# Allegro board WaterDetector_ver1.0.1.brd
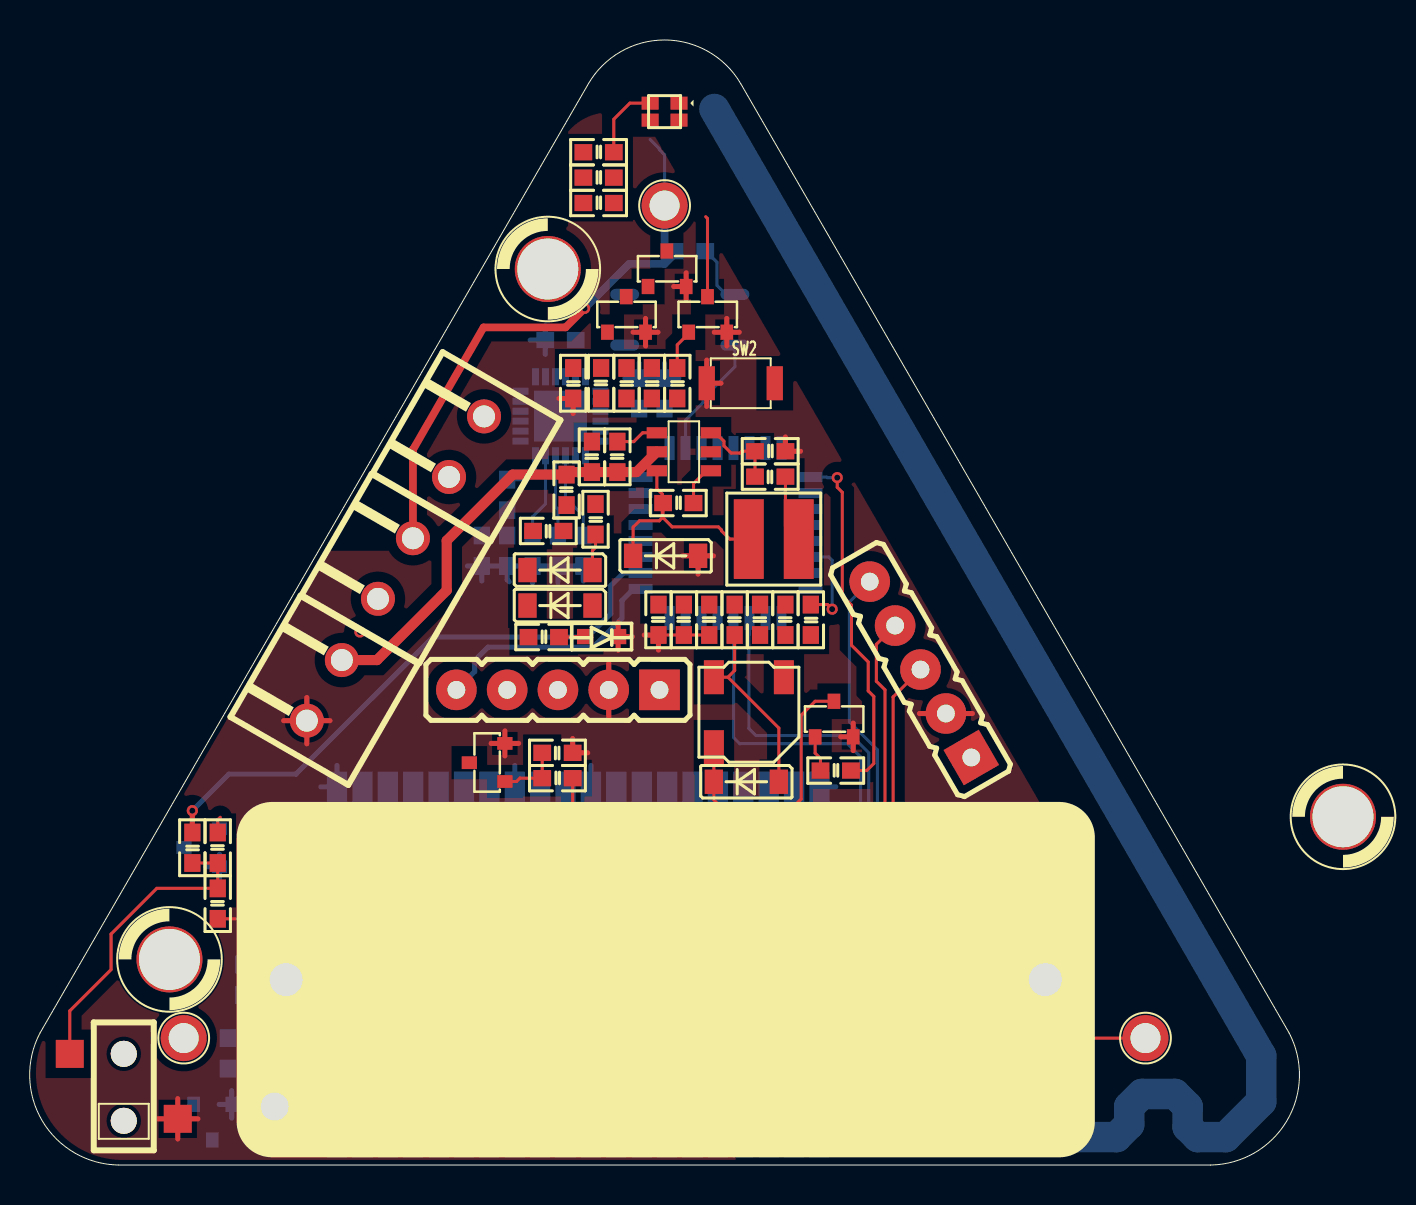
[diagram p0: board, top side]
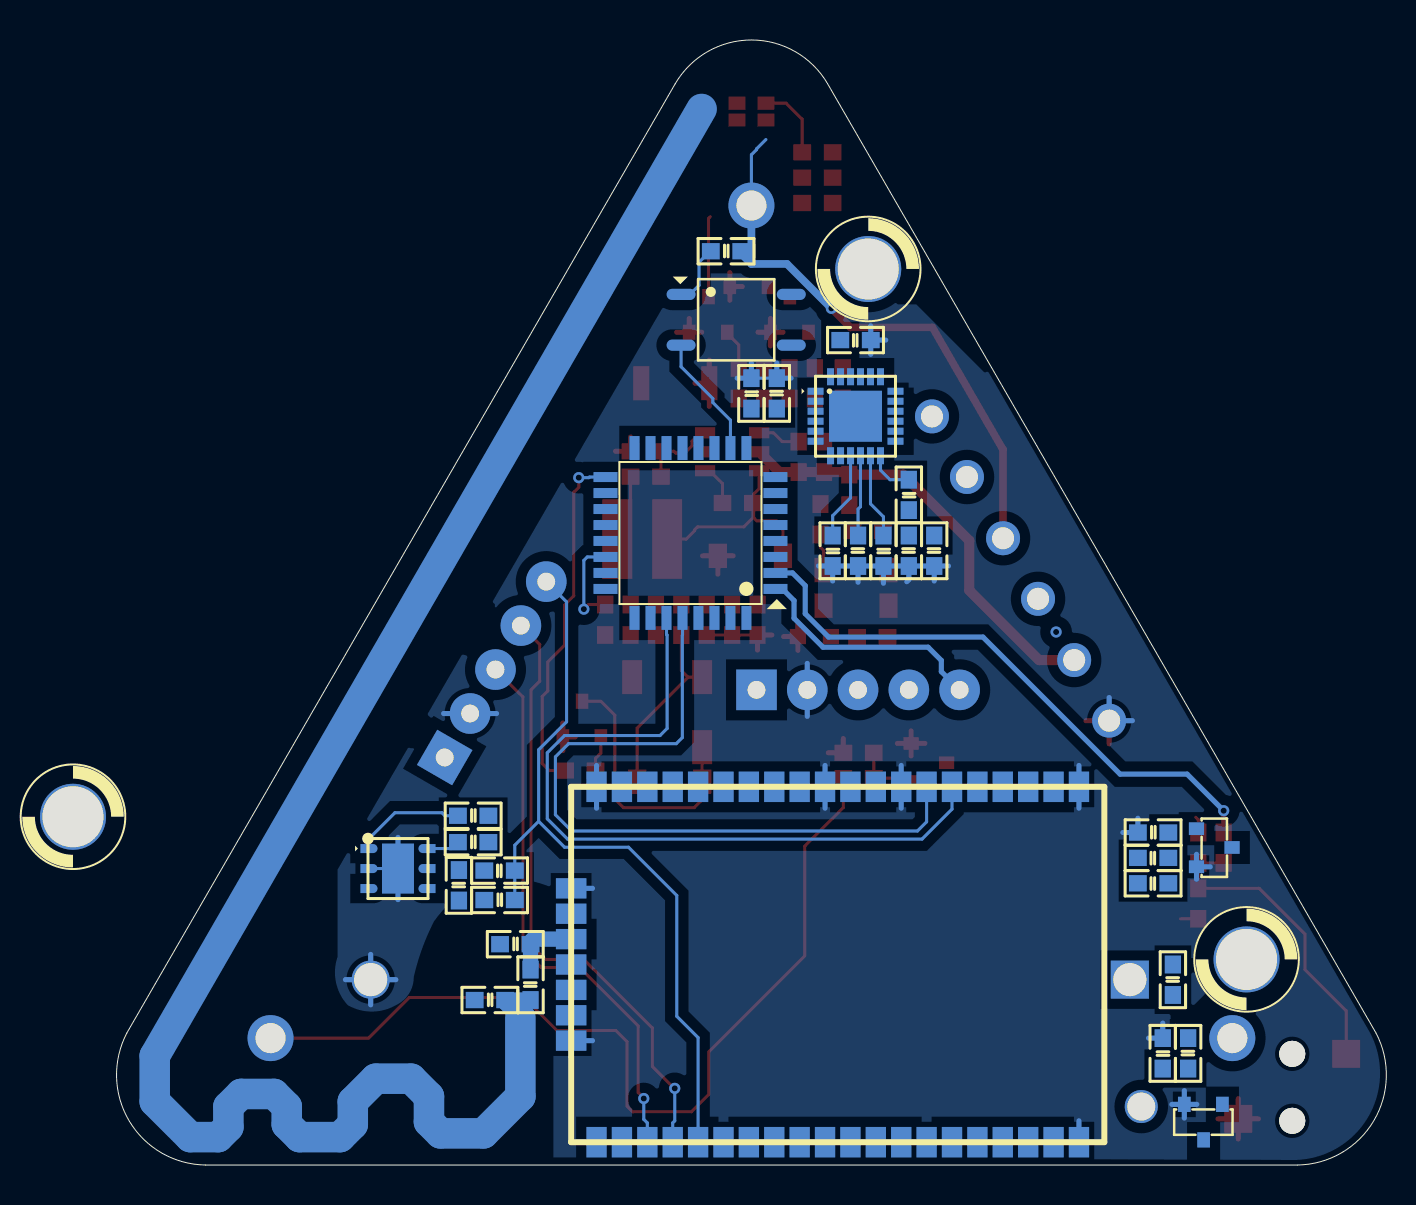
[diagram p1: board, bottom side, seen from below]

Outline 63.52 x 56.29 mm; copper layers: TOP, BOTTOM. Coordinates in mm from the lower left corner of the outline.
Outline path: 0.52,6.6 27.95,54.1 arc(31.76,56.29) 35.57,54.1 63,6.6 arc(62.88,2.2) 59.07,0 4.46,0 arc(0.64,2.2) 0.52,6.6

## Design rules (mm)
nets with their own width: min track width 0.254; nets GND

## Placement (name value [footprint] x y rotation side)
C1  10nF  [C0603]  32.45 33.12 180 top
C2  10uF/25V  [C0603]  26.86 33.78 270 top
C3  10uF  [C0603]  31.46 27.28 270 top
C4  22uF  [C0603]  28.31 32.31 90 top
C5  0.1uF  [C0603]  37.81 27.28 270 top
C8  10pF  [C0603]  43.57 11.05 0 bottom
C9  6pF  [C0603]  44.84 8.26 0 bottom
C10  0.1uF  [C0603]  31.76 38.61 90 bottom
C11  0.1uF  [C0603]  23.89 30.73 270 bottom
C12  2.2nF  [C0603]  26.56 41.27 180 bottom
C13  10nF  [C0603]  22.62 30.73 270 bottom
C14  0.1uF  [C0603]  26.43 30.73 270 bottom
C15  0.1uF  [C0603]  46.39 14 270 bottom
C16  0.1uF  [C0603]  32.73 27.28 270 top
C17  10u  [C0603]  34 27.28 270 top
C18  0.1uF  [C0603]  9.41 13.08 270 top
C19  0.1uF  [C0603]  28.59 39.12 270 top
C20  0.1uF  [C0603]  44.36 13.26 0 bottom
C21  0.1uF  [C0603]  25.95 31.72 0 top
D1  1N5819  [SOD123]  26.53 29.77 0 top
D2  1N5819  [SOD123]  26.53 27.99 0 top
D3  1N5819  [SOD123]  31.81 30.48 0 top
D4  LED  [LED_0603]  28.61 26.44 0 top
D5  1N5819  [SOD123]  35.85 19.18 0 top
D6  Led GRB  [LED_RGB_0606]  31.76 52.7 270 top
H1  MetalLeg  [METALLEG]  31.76 48.01 0 top
H2  MetalLeg  [METALLEG]  7.71 6.35 0 top
H3  MetalLeg  [METALLEG]  55.82 6.35 0 top
J1  EXT_POWER_12V  [TERMINALBLOCK3P5MM]  14.74 23.75 240 top
J3  EXT_LOAD  [TERMINALBLOCK3P5MM]  21.86 35.94 240 top
J4  EXT_SEN  [TERMINALBLOCK3P5MM]  18.3 29.84 240 top
J5  MCU PRG  [HEADER_5]  31.51 23.77 180 top
J6  MCU PRG  [HEADER_5]  47.1 20.39 120 top
L1  4.7uH/1.5A  [IN4D_5X5]  37.22 31.32 270 top
L2  8.2nH  [C0603]  42.81 9.02 270 bottom
LS1  SPEAKER  [BUZZER_ST-0503]  35.98 22.66 270 top
MH1  HOLE 3mm  [MH_3MM_1]  25.92 44.83 0 top
MH2  HOLE 3mm  [MH_3MM_1]  7 10.29 0 top
MH3  HOLE 3mm  [MH_3MM_1]  65.7 17.42 0 top
NOREF  -  []  56.02 -7.11 180 bottom
P1  CR123AHolder  [CR123A_HOLDER]  12.83 9.28 0 top
Q1  MMBT2222A  [SOT-23-3]  9.14 2.15 270 bottom
Q2  MMBT2222A  [SOT-23-3]  8.61 15.89 180 bottom
Q3  MMBT2222A  [SOT-23-3]  22.88 20.13 180 top
Q4  C1815  [SOT-23-3]  40.23 22.31 90 top
Q5  MMBT2222A  [SOT-23-3]  31.88 44.84 90 top
Q6  MMBT2222A  [SOT-23-3]  29.84 42.56 90 top
Q7  MMBT2222A  [SOT-23-3]  33.91 42.56 90 top
R1  10K  [R0603]  29.4 35.43 270 top
R2  49.9K  [R0603]  37.05 34.44 0 top
R3  240R  [R0603]  25.72 26.42 180 top
R4  9.53K  [R0603]  37.05 35.71 180 top
R5  330R  [R0603]  11.67 14.1 180 bottom
R6  330R  [R0603]  10.68 9.27 270 bottom
R7  330R  [R0603]  36.54 27.28 270 top
R8  1K  [R0603]  26.4 19.35 180 top
R9  1K  [R0603]  11.67 15.37 180 bottom
R10  1K  [R0603]  9.92 5.59 270 bottom
R11  1K  [R0603]  33.03 45.72 0 bottom
R12  10K  [R0603]  11.67 16.64 0 bottom
R13  10K  [R0603]  11.19 5.59 90 bottom
R14  10K  [R0603]  26.4 20.62 0 top
R16  10K  [R0603]  30.49 38.61 270 bottom
R17  10K  [R0603]  25.16 30.73 90 bottom
R19  10K  [R0603]  27.7 30.73 90 bottom
R20  10K  [R0603]  23.89 33.53 90 bottom
R21  10k  [R0603]  45.68 17.48 0 bottom
R22  10k  [R0603]  45.68 16.15 0 bottom
R23  27  [R0603]  35.27 27.28 270 top
R24  10K  [R0603]  9.41 15.88 270 top
R25  0R  [R0603]  8.14 15.88 90 top
R26  330R  [R0603]  40.32 19.74 180 top
R27  10K  [R0603]  39.08 27.28 90 top
R28  330R  [R0603]  28.46 49.4 180 top
R29  330R  [R0603]  28.46 48.13 180 top
R30  330R  [R0603]  28.46 50.67 180 top
R31  330R  [R0603]  29.86 39.12 90 top
R32  330R  [R0603]  31.13 39.12 90 top
R33  330R  [R0603]  32.4 39.12 90 top
R34  480R  [R0603]  27.19 39.12 90 top
R35  1.78K  [R0603]  28.13 35.43 270 top
R36  10K  [R0603]  44.36 14.73 180 bottom
SW1  DETECT SW  [TAMPERSW-ESE11MV1]  4.71 5.56 90 top
SW2  button_fsm  [B3U-1000P]  35.57 39.12 180 top
U1  AP3211  [SOT23-6]  32.73 35.69 180 top
U3  CPC1017N  [CPC1017A]  32.52 43.56 180 bottom
U4  STM8L151X4  [LQFP-32]  34.81 31.62 0 bottom
U5  MPU-6050  [MPU-6000]  26.56 37.47 180 bottom
U6  SI7006-A20-IM  [SI7006]  49.44 14.83 180 bottom
U7  -  [RN2483]  14.11 18.92 90 bottom

## Library data of the parts
C1 C2 C4 C5 C19 C21 = CAP NP
C3 C17 = CAP
C8 = C-10pF/50V-SMD0805
C9 = C-6pF/50V-SMD0805
C10-C14 = CAP_USER
C15 = C-100nF/50V-SMD0805
C16 C18 C20 = Cap 0603
D1 D2 D5 = DIODE_0
D3 = SS34_0
D4 = LED_0
D6 = Led GRB_1
H1-H3 = MetalLeg
J1 J3 J4 = HEADER 2
J5 J6 = CON5
L1 = INDUCTOR
L2 = L-8.2nH-SMD0805
LS1 = SPEAKER_0
MH1-MH3 = MOUNTING HOLE
P1 = CR123AHolder
Q1-Q3 = 2SC1130_0
Q4-Q7 = Q2N1893_0
R1 R4 = RES-SM0402_0
R2 = RES-SM0402_1
R3 = RESD,0402,5%,1/16W,4.7K: tolerance: 5%
R5-R14 R34 R35 = R
R16 R17 R19 R20 = R-100R-SMD0805
R21 R22 = R-10k-SMD0805
R23-R33 R36 = Resistor 0603
SW1 = SW PUSHBUTTON-SPST-2
SW2 = button_fsm_0
U1 = PMIC_SOT23-6
U3 = CPC1017A
U4 = STM8L151K4_0
U5 = MPU-6000_1
U6 = SI7021
U7 = RN2483

## Footprints (pads in the part's own frame, mm; a bottom-side part is the same pattern mirrored in y, then rotated)
B3U-1000P
  rect 0.813x1.702 smd: 1(-1.702,0) 2(1.702,0)
BUZZER_ST-0503
  rect 1.699x1.001 smd: 1(-1.75,-1.75) 2(1.75,-1.75) 3(-1.75,1.75)
C0603
  rect 0.889x0.813 smd: 1(-0.762,0) 2(0.762,0)
CPC1017A
  oval 1.448x0.559 smd: 1(-2.756,0) 2(-2.756,-2.54) 3(2.756,-2.54) 4(2.756,0)
CR123A_HOLDER
  round 1.651 hole 1.397: (-0.572,-6.35)
  rect 1.905x1.905 hole 1.651: 1(0,0)
  round 1.905 hole 1.651: 2(37.973,0)
HEADER_5
  rect 2.032x2.032 hole 0.889: 1(0,0)
  round 2.032 hole 0.889: 2(2.54,0) 3(5.08,0) 4(7.62,0) 5(10.16,0)
IN4D_5X5
  rect 3.988x1.499 smd: 1(0,-1.25) 2(0,1.25)
LED_0603
  rect 0.813x0.762 smd: 1(-0.826,0) 2(0.826,0)
LED_RGB_0606
  rect 0.65x0.851 smd: 1(-0.424,0.724) 2(0.424,0.724) 3(-0.424,-0.724) 4(0.424,-0.724)
LQFP-32
  rect 1.199x0.5 smd: 1(-4.249,2.799) 2(-4.249,1.999) 3(-4.249,1.199) 4(-4.249,0.399) 5(-4.249,-0.399) 6(-4.249,-1.199) 7(-4.249,-1.999) 8(-4.249,-2.799) 17(4.249,-2.799) 18(4.249,-1.999) 19(4.249,-1.199) 20(4.249,-0.399) 21(4.249,0.399) 22(4.249,1.199) 23(4.249,1.999) 24(4.249,2.799)
  rect 0.5x1.199 smd: 9(-2.799,-4.249) 10(-1.999,-4.249) 11(-1.199,-4.249) 12(-0.399,-4.249) 13(0.399,-4.249) 14(1.199,-4.249) 15(1.999,-4.249) 16(2.799,-4.249) 25(2.799,4.249) 26(1.999,4.249) 27(1.199,4.249) 28(0.399,4.249) 29(-0.399,4.249) 30(-1.199,4.249) 31(-1.999,4.249) 32(-2.799,4.249)
METALLEG
  round 2.301 hole 1.501: 1(0,0)
MH_3MM_1
  round 3.302 hole 3.048: 1(0,0)
MPU-6000
  rect 0.8x0.351 smd: 1(-1.999,1.25) 2(-1.999,0.749) 3(-1.999,0.249) 4(-1.999,-0.249) 5(-1.999,-0.749) 6(-1.999,-1.25) 13(1.999,-1.25) 14(1.999,-0.749) 15(1.999,-0.249) 16(1.999,0.249) 17(1.999,0.749) 18(1.999,1.25)
  rect 0.351x0.851 smd: 7(-1.25,-1.976) 8(-0.749,-1.976) 9(-0.249,-1.976) 10(0.249,-1.976) 11(0.749,-1.976) 12(1.25,-1.976) 19(1.25,1.976) 20(0.749,1.976) 21(0.249,1.976) 22(-0.249,1.976) 23(-0.749,1.976) 24(-1.25,1.976)
  rect 2.649x2.55 smd: 25(0,0)
R0603
  rect 0.889x0.813 smd: 1(-0.762,0) 2(0.762,0)
RN2483
  rect 1.524x1.016 smd: 1(0,1.27) 2(0,2.54) 3(0,3.81) 4(0,5.08) 5(0,6.35) 6(0,7.62) 7(0,8.89) 8(0,10.16) 9(0,11.43) 10(0,12.7) 11(0,13.97) 12(0,15.24) 13(0,16.51) 14(0,17.78) 15(0,19.05) 16(0,20.32) 17(0,21.59) 18(0,22.86) 19(0,24.13) 20(0,25.4) 28(-17.78,25.4) 29(-17.78,24.13) 30(-17.78,22.86) 31(-17.78,21.59) 32(-17.78,20.32) 33(-17.78,19.05) 34(-17.78,17.78) 35(-17.78,16.51) 36(-17.78,15.24) 37(-17.78,13.97) 38(-17.78,12.7) 39(-17.78,11.43) 40(-17.78,10.16) 41(-17.78,8.89) 42(-17.78,7.62) 43(-17.78,6.35) 44(-17.78,5.08) 45(-17.78,3.81) 46(-17.78,2.54) 47(-17.78,1.27)
  rect 1.016x1.524 smd: 21(-5.08,26.67) 22(-6.35,26.67) 23(-7.62,26.67) 24(-8.89,26.67) 25(-10.16,26.67) 26(-11.43,26.67) 27(-12.7,26.67)
SI7006
  custom 0.851x0.452 smd: 1(-1.45,1.001) 2(-1.45,0) 3(-1.45,-1.001) 4(1.45,-1.001) 5(1.45,0) 6(1.45,1.001)
  rect 1.6x2.499 smd: 7(0,0)
SOD123
  rect 0.914x1.219 smd: 1(1.626,0) 2(-1.626,0)
SOT23-6
  rect 1.016x0.559 smd: 1(-1.351,0.95) 2(-1.351,0) 3(-1.351,-0.95) 4(1.351,-0.95) 5(1.351,0) 6(1.351,0.95)
SOT-23-3
  rect 0.762x0.635 smd: 1(-0.889,0.94) 2(-0.889,-0.965) 3(0.889,0)
TAMPERSW-ESE11MV1
  rect 1.4x1.4 smd: 1(0,2.7) 4(-3.251,-2.7)
  round 1.3 hole 1.3: 2(-3.35,0) 3(0,0)
TERMINALBLOCK3P5MM
  round 1.699 hole 1.1: 1(-1.75,0) 2(1.75,0)

## Nets
3V3: C3.1 C10.1 C11.1 C13.1 C15.1 C16.1 C17.1 C21.1 D1.2(K) D2.2(K) D6.4(+) H1.1 J4.1 J5.1 J6.1 R3.2 R5.1 R6.1 R7.1 R11.1 R20.1 R21.1 R22.1 R23.1 R24.1 R27.1 R36.1 U4.8(VDD1/VDDA/VREF+) U5.8(VLOGIC) U5.13(VDD) U6.5(VDD) U7.12(VDD) U7.34(VDD2)
12V: C2.1 J1.1 R1.2 R35.2 U1.5(IN)
GND: C2.2 C3.2 C4.2 C5.2 C8.2 C9.2 C10.2 C11.2 C12.2 C13.2 C14.2 C15.2 C16.2 C17.2 C18.2 C19.2 C20.2 C21.2 D3.1(ANODE) D4.2(CATHODE) J1.2 J5.2 J6.2 P1.2(-) Q1.2(E) Q2.2(E) Q3.2(E) Q4.2(E) Q5.2(E) Q6.2(E) Q7.2(E) R4.1 R12.2 R13.2 R14.2 R16.1 R17.1 R19.1 R34.1 SW1.4 SW2.2 U1.2(GND) U4.7(VSS1/VSSA/VREF-) U5.18(GND) U5.25(GND25) U6.2(GND) U6.7(PAD) U7.1(GND1) U7.8(GND8) U7.11(GND11) U7.20(GND20) U7.21(GND21) U7.22(GND22) U7.24(GND24) U7.26(GND26) U7.27(GND27) U7.33(GND33) U7.41(GND41) U7.47(GND47)
V3V3_SAMPLE: C5.1 D2.1(A) P1.1(+) U4.24(TIM1_CH1N/ADC1_IN7/RTC_ALARM/VR)
V12V_SAMPLE: C19.1 R34.2 R35.1 U4.12(PD3/TIM1_ETR/ADC1_IN19/COMP1_IN)
ALARM: U3.2(-) U4.10(PD1/TIM1_CH3N/ADC1_IN21/COMP2_I)
ANTEN: C9.1 L2.2
BUTTON: R27.2 SW2.1 U4.22(TIM1_CH3/ADC1_IN9/COMP1_INP/PD5)
BUZZER: R26.1 U4.17(ADC1_IN14/COMP1_INP/DAC_OUT)
EXT_SEN: Q2.3(C) R5.2 U4.9(PD0/TIM3_CH2/ADC1_IN22/COMP_INP)
HUMIDITY_SEN_SCL: J5.3 R22.2 U4.26(I2C1_SCL) U5.23(SCL) U6.6(SCL)
HUMIDITY_SEN_SDA: J5.4 R21.2 U4.25(I2C1_SDA) U5.24(SDA) U6.1(SDA)
LED_B: R33.1 U4.16(PB3/TIM1_CH2N/ADC1_IN15/COMP1_I)
LED_G: R32.1 U4.15(PB2/TIM2_CH2/ADC1_IN16/COMP1_IN)
LED_R: R31.1 U4.14(PB1/TIM3_CH1/ADC1_IN17/COMP1_IN)
LORA_RESET: C20.1 J6.5 R36.2 U7.32(RESET)
MPU-INT: R20.2 U4.3(PA3/OSC_OUT) U5.12(INT)
NRST: J5.5 U4.1(PA1/NRST)
PGC_INT: J6.3 U7.30(PGC_INT)
PGD_INT: J6.4 U7.31(PGD_INT)
RF: C8.1 L2.1 U7.23(RFH)
STM_UART_RX: U4.27(UART1_RX/LCD_SEG22/ADC1_IN6/COM) U7.6(UART_TX)
STM_UART_TX: U4.28(USART1_TX/ADC1_IN5/OMP1_INP/OMP) U7.7(UART_RX)
TAMPER: R25.2 U4.2(PA2/OSC_IN)
WATER_SEN_1: Q1.3(C) R6.2 U4.11(PD1/TIM1_CH1/ADC1_IN20/COMP1_IN)
WATER_SEN_2: Q3.3(C) R7.2 U4.23(TIM1_BKIN/ADC1_IN8/RTC_CALI/VRE)
N1650025: Q1.1(B) R10.2 R13.1
N1687500: Q3.1(B) R8.2 R14.1
N1687938: H2.1 R10.1
N1687950: H3.1 R8.1
N1694456: Q2.1(B) R9.2 R12.1
N1694970: Q7.3(C) R30.2
N1694974: Q6.3(C) R29.2
N1695042: Q5.1(B) R31.2
N1695078: Q5.3(C) R28.2
N1695082: Q6.1(B) R32.2
N1695154: Q7.1(B) R33.2
N1697652: C12.1 U5.20(CPOUT)
N1701027: C14.1 U5.10(REGOUT)
N1703483: J4.2 R9.1
N1721501: D5.2(K) LS1.2 Q4.3(C)
N1721505: D5.1(A) LS1.1 R23.2
N1750684: C18.1 R24.2 R25.1 SW1.1
N1759739: D6.1(RED) R28.1
N1759748: D6.3(BLUE) R30.1
N1759754: D6.2(GREEN) R29.1
N1771086: C4.1 D1.1(A) L1.2 R2.2
N1771226: C1.2 D3.2(CATHODE) L1.1 U1.6(SW)
N1771238: C1.1 U1.1(BS)
N1771286: R2.1 R4.2 U1.3(FB)
N1771536: R1.1 U1.4(EN)
N1781404: R19.2 U5.9(AD0)
N1798198: D4.1(ANODE) R3.1
N1800565: J3.2 U3.4(LOAD2)
N1800577: J3.1 U3.3(LOAD1)
N16974520: R16.2 U5.1(CLKIN)
N17183070: R11.2 U3.1(+)
N17216350: Q4.1(B) R26.2
N169745210: R17.2 U5.11(FSYNC)

Pads without a net: LS1 3; MH1 1; MH2 1; MH3 1; SW1 2 3; U4 4 5 6 13 18 19 20 21 29 30 31 32; U5 2 3 4 5 6 7 14 15 16 17 19 21 22; U6 3 4; U7 2 3 4 5 9 10 13 14 15 16 17 18 19 25 28 29 35 36 37 38 39 40 42 43 44 45 46

## Via types
v1: diameter 0.559, hole 0.305, TOP to BOTTOM, 7 vias

## Routing (per net, layer and track width the routed paths; a pad name or vN(x,y) marks a point on that pad's centre or on a via; arc(x,y) is an arc through that point)
3V3: length 30
  TOP w0.152: R24.1 9.41,17.27 9.54,17.4
  TOP w0.381: 19.18,31.36 19.18,35.8 19.19,35.81 22.71,41.91 26.81,41.91 v1(27.76,42.86)
  BOTTOM w0.152: 31.04,51.31 31.51,50.84 31.51,50.8 31.76,50.55 H1.1
  BOTTOM w0.381: 31.76,45.09 32.27,45.59 R11.1 ; 31.76,45.09 29.98,45.09 v1(27.76,42.86) ; 31.76,45.09 H1.1
12V: length 21.5
  TOP w0.508: U1.5 30.36,34.67 R1.2 R35.2 26.99,34.67 C2.1 24.17,34.54 20.87,31.24 20.87,28.75 17.38,25.27 15.62,25.27
GND: length 105.2
  TOP w0.152: C17.2 C16.2 C3.2 ; 9.41,12.32 10.3,12.32
  TOP w0.254: Q7.2 35.5,41.67 ; Q7.2 34.87,42.36 ; Q7.2 34.25,41.67 ; Q7.2 34.87,40.98 ; Q4.2 41.2,22.11 ; Q4.2 41.2,20.74 ; Q4.2 40.57,21.42 ; 30.74,26.52 C3.2 31.46,25.77 ; 28.97,25.1 J5.2 28.97,22.45 ; 30.81,40.98 Q6.2 ; Q6.2 31.43,41.67 ; Q6.2 30.81,42.36 ; Q6.2 30.18,41.67 ; P1.2 52.07,9.28 ; P1.2 49.55,9.28 ; P1.2 50.81,8.02 ; P1.2 50.81,10.54 ; 44.51,22.59 J6.2 47.16,22.59 ; 6.4,2.31 SW1.4 ; SW1.4 7.41,1.3 ; SW1.4 8.42,2.31 ; SW1.4 7.41,3.32 ; Q5.2 32.84,44.64 ; Q5.2 32.22,43.95 ; Q5.2 32.84,43.27 ; 33.44,29.56 D3.1 ; D3.1 32.67,30.48 ; D3.1 34.2,30.48 ; Q3.2 23.77,21.72 ; Q3.2 24.46,21.09 ; Q3.2 23.09,21.09 ; Q3.2 23.77,20.47 ; 13.87,22.23 15.03,22.23 ; 13.87,22.23 12.71,22.23 ; 13.87,22.23 13.87,23.39 ; 13.87,22.23 13.87,21.07 ; D4.2 29.44,27.13 ; D4.2 30.15,26.44 ; D4.2 29.44,25.75 ; 27.19,37.6 R34.1 26.48,38.35 ; 27.16,21.34 R14.2 27.92,20.62 ; SW2.2 34.58,39.12 ; SW2.2 33.87,40.27 ; SW2.2 33.87,37.96 ; 37.81,36.43 R4.1 38.56,35.71
  BOTTOM w0.152: U6.2 U6.7 ; C10.2 R16.1
  BOTTOM w0.254: C13.2 C11.2 ; C13.2 21.9,29.97 ; C13.2 22.62,29.22 ; C11.2 23.89,29.29 23.99,29.18 ; C11.2 R17.1 ; 31.76,40.12 C10.2 32.48,39.37 ; 49.44,16.39 U6.7 49.44,13.28 ; C14.2 R19.1 ; C14.2 R17.1 ; C14.2 26.43,29.16 ; R19.1 27.7,29.22 ; R19.1 28.41,29.97 ; 11.9,6.35 R13.2 11.19,7.1 ; 25.04,41.27 C12.2 ; C12.2 25.79,40.56 ; C12.2 25.79,41.99 ; 28.97,22.45 J5.2 28.97,25.1 ; 39.71,13.84 40.78,13.84 40.78,14.66 ; 15.38,17.85 U7.1 ; U7.1 15.38,19.99 ; U7.1 14.56,18.92 ; 9.48,3.04 Q1.2 ; Q1.2 10.73,3.04 ; Q1.2 10.11,2.35 ; Q1.2 10.11,3.72 ; R17.1 25.16,29.11 ; 24.27,17.85 U7.8 24.27,19.99 ; 28.08,19.99 28.08,17.85 ; 9.5,14.3 Q2.2 ; Q2.2 8.81,14.92 ; Q2.2 9.5,15.55 ; 44.51,22.59 J6.2 47.16,22.59 ; U7.20 40.32,18.92 ; U7.20 39.51,17.85 ; U7.20 39.51,19.99 ; 29.78,39.37 R16.1 30.49,40.12 ; 14.56,1.14 15.38,1.14 15.38,2.21 ; 49.55,9.28 P1.2 ; P1.2 50.81,10.54 ; P1.2 50.81,8.02 ; P1.2 52.07,9.28 ; 12.43,17.35 R12.2 13.18,16.64 ; 40.78,5.41 40.78,6.22 39.71,6.22 ; 12.71,22.23 13.87,22.23 13.87,23.39
ALARM: length 6.2
  BOTTOM w0.152: U3.2 35.28,39.94 33.69,38.35 33.69,38.15 32.81,37.27 U4.10
ANTEN: length 89.9
  BOTTOM w0.762: 43.32,7.37 44.08,8.13 44.08,8.26 42.81,8.26
  BOTTOM w1.524: 34.25,52.84 61.61,5.46 61.61,3.17 59.83,1.4 58.43,1.4 57.92,1.91 57.92,2.92 57.29,3.56 55.64,3.56 55,2.92 55,2.03 54.37,1.4 52.34,1.4 51.7,2.03 51.7,3.17 50.56,4.32 48.78,4.32 47.89,3.43 47.89,2.16 47.32,1.58 45.16,1.58 43.32,3.43 43.32,7.37
BUTTON: length 4.8
  TOP w0.152: R27.2 39.92,28.04 v1(40.14,27.81)
  BOTTOM w0.152: U4.22 39.97,30.42 40.14,30.25 v1(40.14,27.81)
BUZZER: length 17.7
  TOP w0.152: v1(40.4,34.39) 40.4,33.91 40.65,33.66 40.65,28.47 41.11,28.02 41.11,26.01 41.95,25.17 41.95,23.72 42.23,23.44 42.23,20.09 41.87,19.74 R26.1
  BOTTOM w0.152: U4.17 39.86,34.42 39.89,34.39 v1(40.4,34.39)
HUMIDITY_SEN_SCL: length 1.7
  BOTTOM w0.152: R22.2 46.76,15.83 U6.6
HUMIDITY_SEN_SDA: length 5.5
  BOTTOM w0.152: U6.1 50.89,15.84 50.89,16.33 49.59,17.63 47.24,17.63 47.09,17.48 R21.2
LORA_RESET: length 38.7
  BOTTOM w0.152: 42.4,17.2 42.4,20.78 41.01,22.17 41.01,28.17 J6.5 ; 42.4,17.2 41.11,15.9 37.91,15.9 35.5,13.49 35.5,7.44 34.43,6.38 34.43,1.14 ; 42.4,17.2 43.6,16 R36.2 C20.1
MPU-INT: length 2.3
  BOTTOM w0.152: U5.12 25.31,34.77 24.83,34.29 R20.2
Net_5:
  vias: v1(16.52,26.67)
NRST: length 12.1
  BOTTOM w0.254: J5.5 22.26,24.69 22.26,25.25 22.92,25.91 28.18,25.91 29.63,27.36 29.63,28.24 30.21,28.82 U4.1
PGC_INT: length 27.9
  TOP w0.152: v1(37.15,3.33) 37.15,3.35 37.43,3.63 37.43,6.96 40.35,9.88 42.28,9.88 43.19,10.79 43.19,23.42 J6.3
  BOTTOM w0.152: 36.97,1.14 36.97,2.11 37.15,2.29 v1(37.15,3.33)
PGD_INT: length 30.6
  TOP w0.152: v1(35.6,3.84) 35.62,3.84 36.72,4.93 36.72,6.86 40.14,10.29 42.07,10.29 42.79,11 42.79,23.77 42.35,24.21 42.35,26.05 J6.4
  BOTTOM w0.152: v1(35.6,3.84) 35.6,2.21 35.7,2.11 35.7,1.14
RF: length 3.5
  BOTTOM w0.762: L2.1 C8.1 42.81,11.18 42.68,11.3 40.78,11.3
STM_UART_RX: length 37.7
  BOTTOM w0.152: U7.6 21.73,17.81 23.23,16.31 40.96,16.31 41.97,17.32 41.97,20.62 41.11,21.49 36.33,21.49 35.98,21.84 35.98,26.52 36.01,26.55 U4.27
STM_UART_TX: length 36.5
  BOTTOM w0.152: U4.28 35.21,26.53 35.22,26.52 35.22,21.39 35.52,21.08 40.91,21.08 41.57,20.42 41.57,17.53 40.75,16.71 23.46,16.71 23,17.17 23,18.92
TAMPER: length 29.3
  TOP w0.254: v1(8.14,17.73) R25.2
  BOTTOM w0.254: v1(8.14,17.73) 9.97,19.56 13.32,19.56 20.18,26.42 27.9,26.42 29.07,27.58 29.07,28.99 29.71,29.62 U4.2
N1687500: length 3.2
  TOP w0.152: Q3.1 24.36,19.19 24.52,19.35 R8.2 R14.1
N1687950: length 46
  TOP w0.152: H3.1 50.91,6.35 48.88,8.38 43.14,8.38 41.49,6.73 38.54,6.73 37.99,6.17 37.99,2.95 37.71,2.67 34.76,2.67 33.9,3.53 33.9,5.66 29.1,10.46 29.1,15.95 27.16,17.88 R8.1
N1694970: length 4
  TOP w0.152: Q7.3 33.91,47.36 33.82,47.45
N1695154: length 2
  TOP w0.152: Q7.1 32.97,41.61 32.4,41.03 R33.2
N1701027: length 4
  BOTTOM w0.152: U5.10 26.31,32.94 26.43,32.82 C14.1
N1721501: length 13.5
  TOP w0.152: LS1.2 34.23,19.18 D5.2 34.23,18.27 34.62,17.88 38.16,17.88 38.59,18.31 38.59,22.5 39.29,23.2 Q4.3
N1721505: length 9.2
  TOP w0.152: 34.93,24.41 35.27,24.74 R23.2 ; 34.93,24.41 LS1.1 ; 34.93,24.41 37.48,21.86 D5.1
N1750684: length 15.7
  TOP w0.152: SW1.1 2.01,7.71 4.08,9.78 4.08,11.56 6.36,13.84 C18.1 R24.2 R25.1
N1759748: length 3.8
  TOP w0.152: D6.3 30.03,53.13 29.22,52.32 R30.1
N1771086: length 5.2
  TOP w0.152: D1.1 28.16,30.75 28.31,30.9 C4.1 ; L1.2 37.81,31.98 R2.2
N1771226: length 11.1
  TOP w0.152: 31.65,33.12 C1.2 31.69,32.38 32.14,31.93 34.45,31.93 34.61,31.78 34.61,31.73 35.02,31.32 L1.1 ; 31.65,33.12 31.65,32.38 31.5,32.23 30.5,32.23 30.19,31.92 D3.2 ; 31.65,33.12 31.65,33.57 31.38,33.84 U1.6
N1771238: length 2.1
  TOP w0.152: C1.1 33.21,34.1 33.85,34.74 U1.1
N1771286: length 4.1
  TOP w0.152: U1.3 34.31,36.64 34.73,36.21 34.73,35.98 35.09,35.62 35.54,35.62 35.64,35.71 R4.2 R2.1
N1771536: length 2.2
  TOP w0.152: R1.1 30.22,36.2 30.66,36.64 U1.4
N1781404: length 4.4
  BOTTOM w0.152: U5.9 26.8,33.38 27.7,32.49 R19.2
N1798198: length 1.3
  TOP w0.152: D4.1 27.15,26.44 27.13,26.42 R3.1
N17183070: length 3.1
  BOTTOM w0.152: U3.1 34.84,43.56 34.38,44.01 34.38,45.17 33.83,45.72 R11.2
N17216350: length 1.8
  TOP w0.152: R26.2 39.56,20.35 39.29,20.61 Q4.1
N169745210: length 4.3
  BOTTOM w0.152: U5.11 25.81,33.08 25.16,32.44 R17.2

## Copper pours and planes (outline as drawn; the poured copper is in the pictures)
GND on TOP: 36.65,42.16 48.38,21.86 52.72,14.35 52.72,9.14 52.18,7.99 51.07,7.37 43.95,7.37 43.25,7.44 42.6,7.71 41.03,8.81 39.25,9.53 37.29,9.78 35.32,9.53 35.32,0.25 4.56,0.25 0.91,2.4 0.82,6.63 14.74,30.73 17.92,30.73 17.92,32.13 19.44,33.66 19.44,37.34 22.24,40.13 22.24,41.91 22.75,42.42 25.41,42.42 25.16,42.67 25.16,45.97 25.92,45.97 26.94,46.99 26.94,51.7 29.09,52.67 31.2,51.62 31.58,50.95 31.61,50.88 31.64,50.8 31.65,50.83 33.37,47.84 ; 3 cut-outs
GND on BOTTOM: 4.56,0.25 0.91,2.4 0.82,6.63 26.62,51.3 29.01,52.21 31.38,51.25 52.46,14.78 52.46,10.41 52.54,9.14 51.96,8 50.75,7.68 49.54,8 48.89,8.57 48.65,9.4 48.65,9.4 48.23,10.83 47.64,12.19 46.94,13.02 46.11,13.72 43.91,14.3 41.67,13.84 41.67,0.38 ; 5 cut-outs

## Text on the board
Ref Des/Silkscreen Bottom: WaterDetector_ver1.0.0
DEVICE_TYPE_TOP: FIGURE | SIZE | 12.0 | 35.0 | 40.0 | 43.3 | 50.0 | 51.2 | 55.0 | 59.1 | 65.0 | 120.0 | DRILL CHART: TOP to BOTTOM | ALL UNITS ARE IN MILS | TOLERANCE | +0.0/-0.0 | +5.0/-0.0 | PLATED | QTY | 116 | 1 | 4 | 6 | 5 | 2 | 3
